# Altium PCB first-pcb-project.PcbDoc
Units mil, origin at the board's own origin, x right, y up, seen from the top; angles counter-clockwise.
Board outline 2321.98 x 2077.03 mil, 4 copper layers (Top Layer, GND Layer, 3.3V Layer, Bottom Layer), stack 23.756 mil thick; 88 components, 43 nets, 307 pads, 78 vias.
Unrouted connection lines stored in the file: 5.
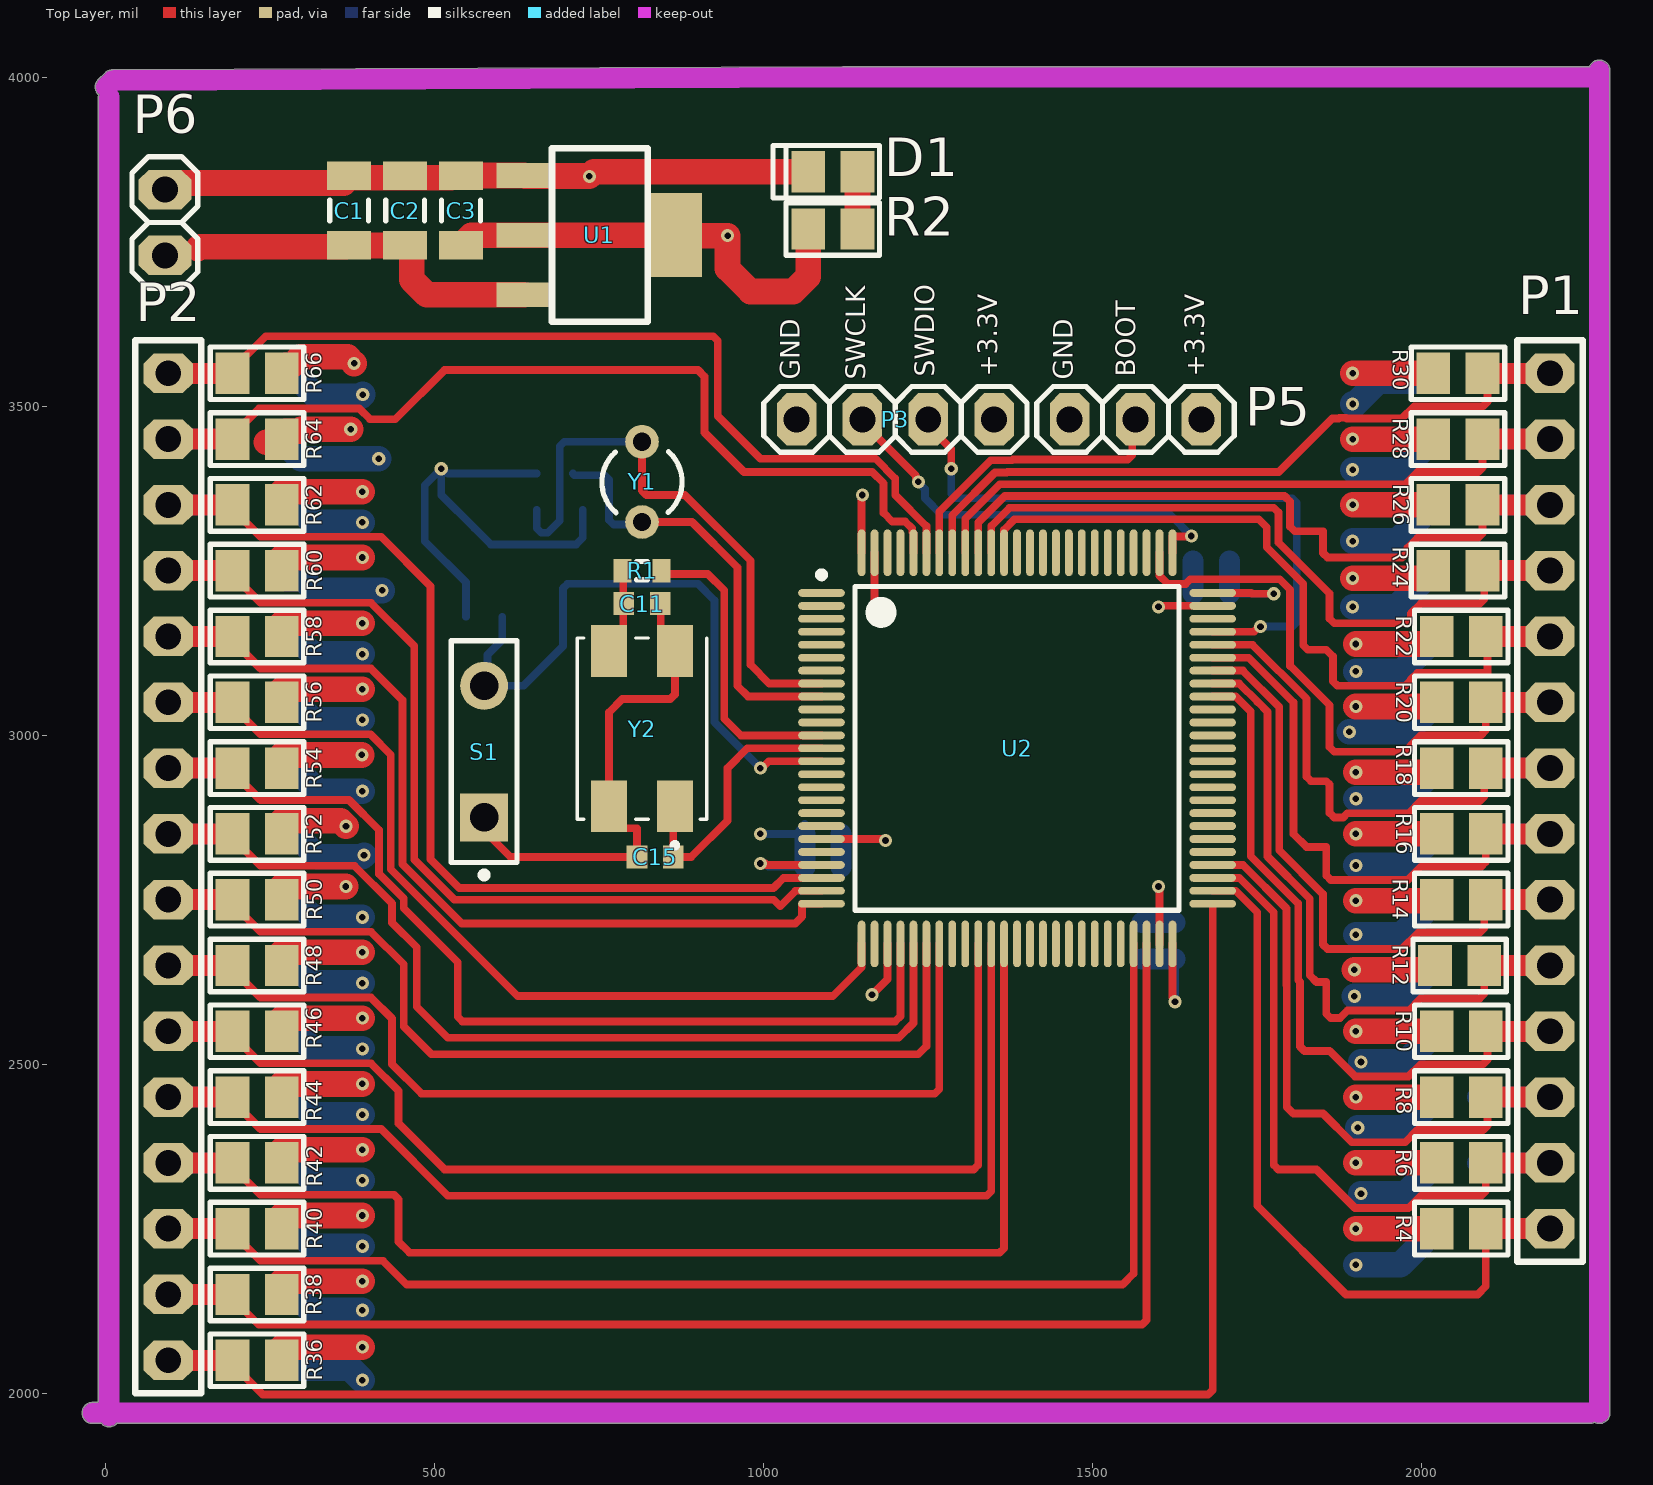
[diagram p0: Top Layer view]
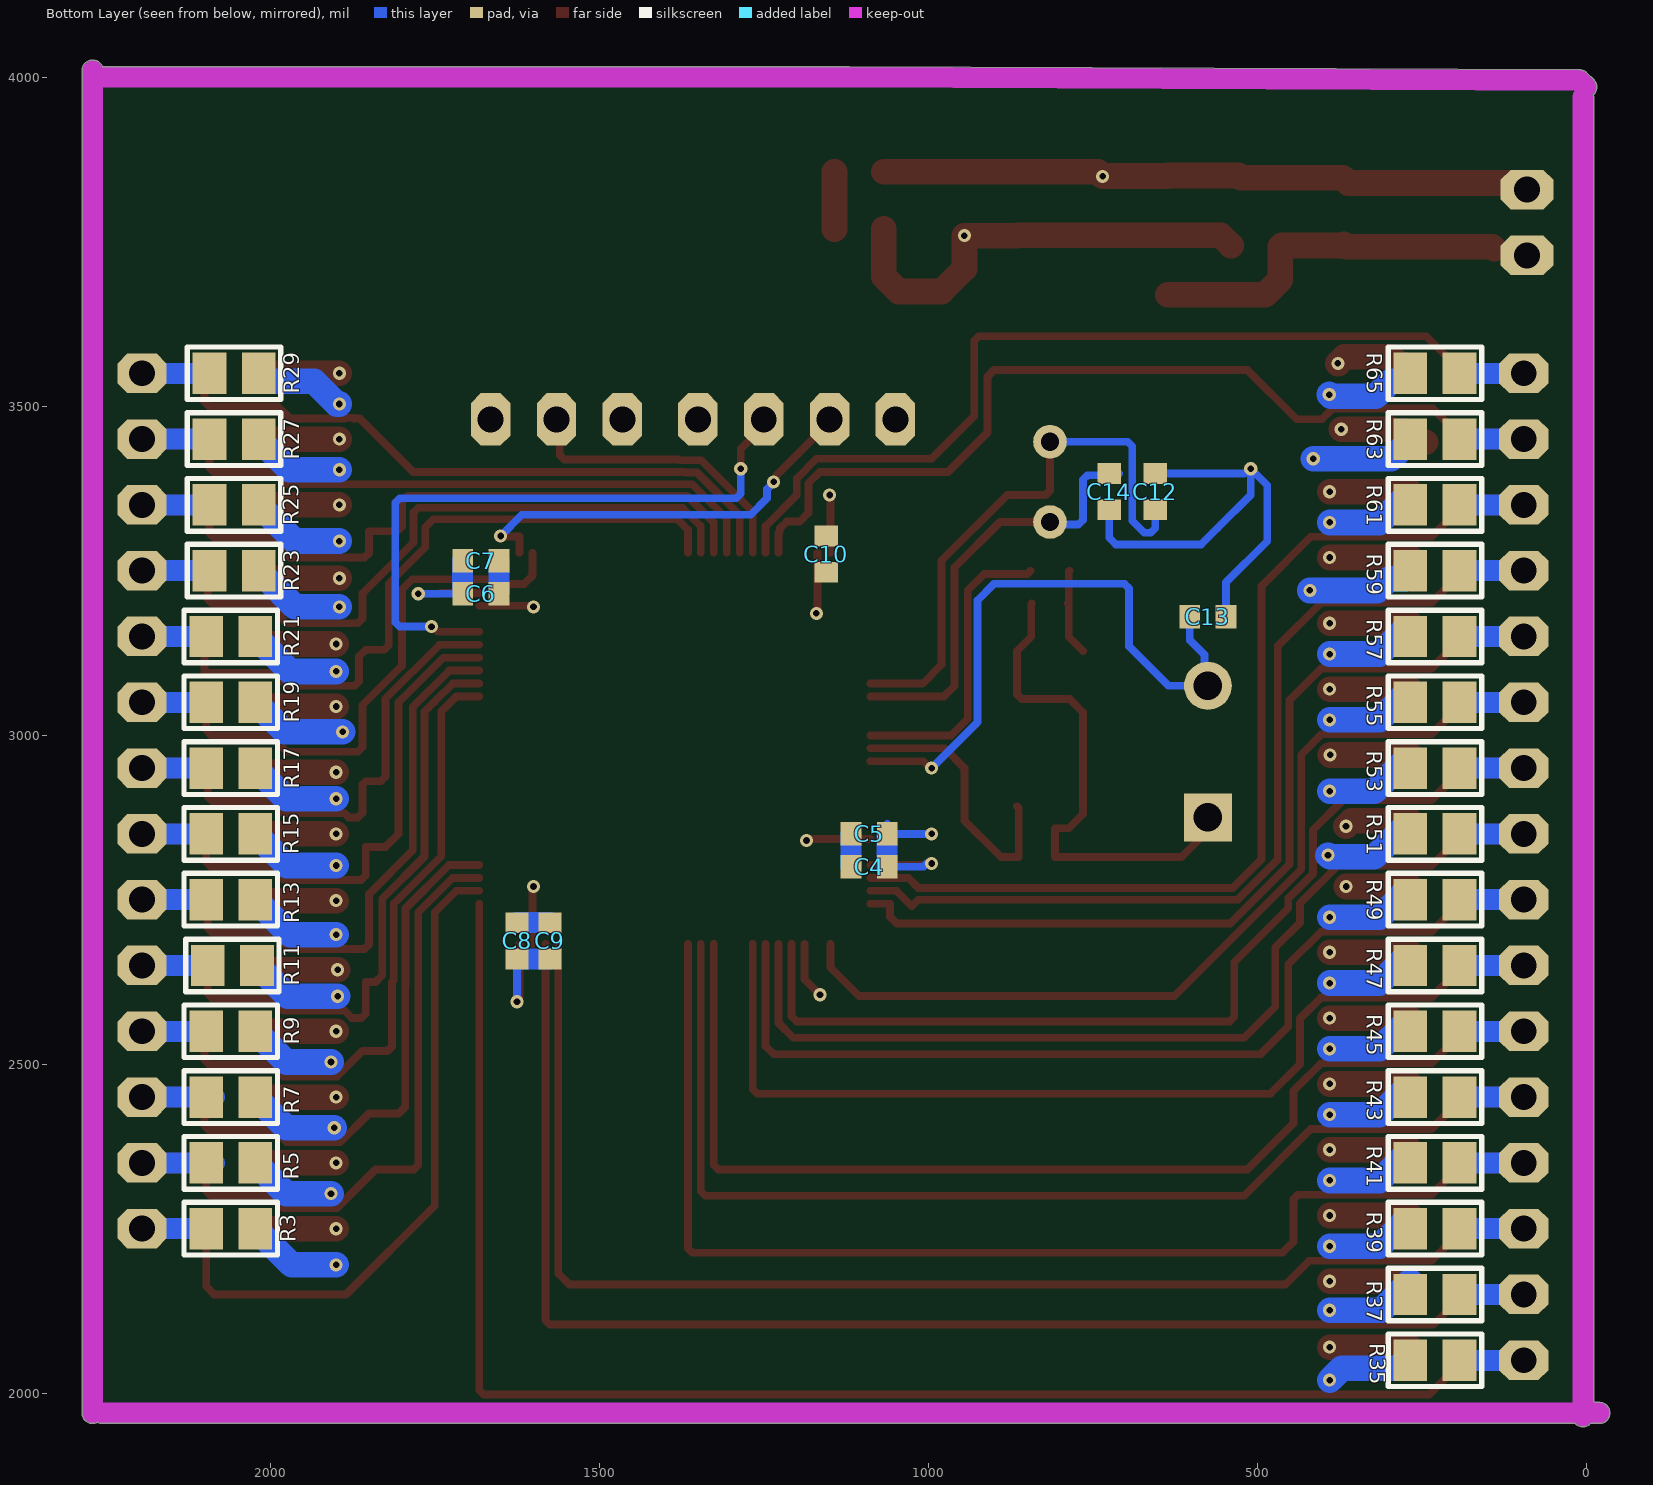
[diagram p1: Bottom Layer view, seen from below]
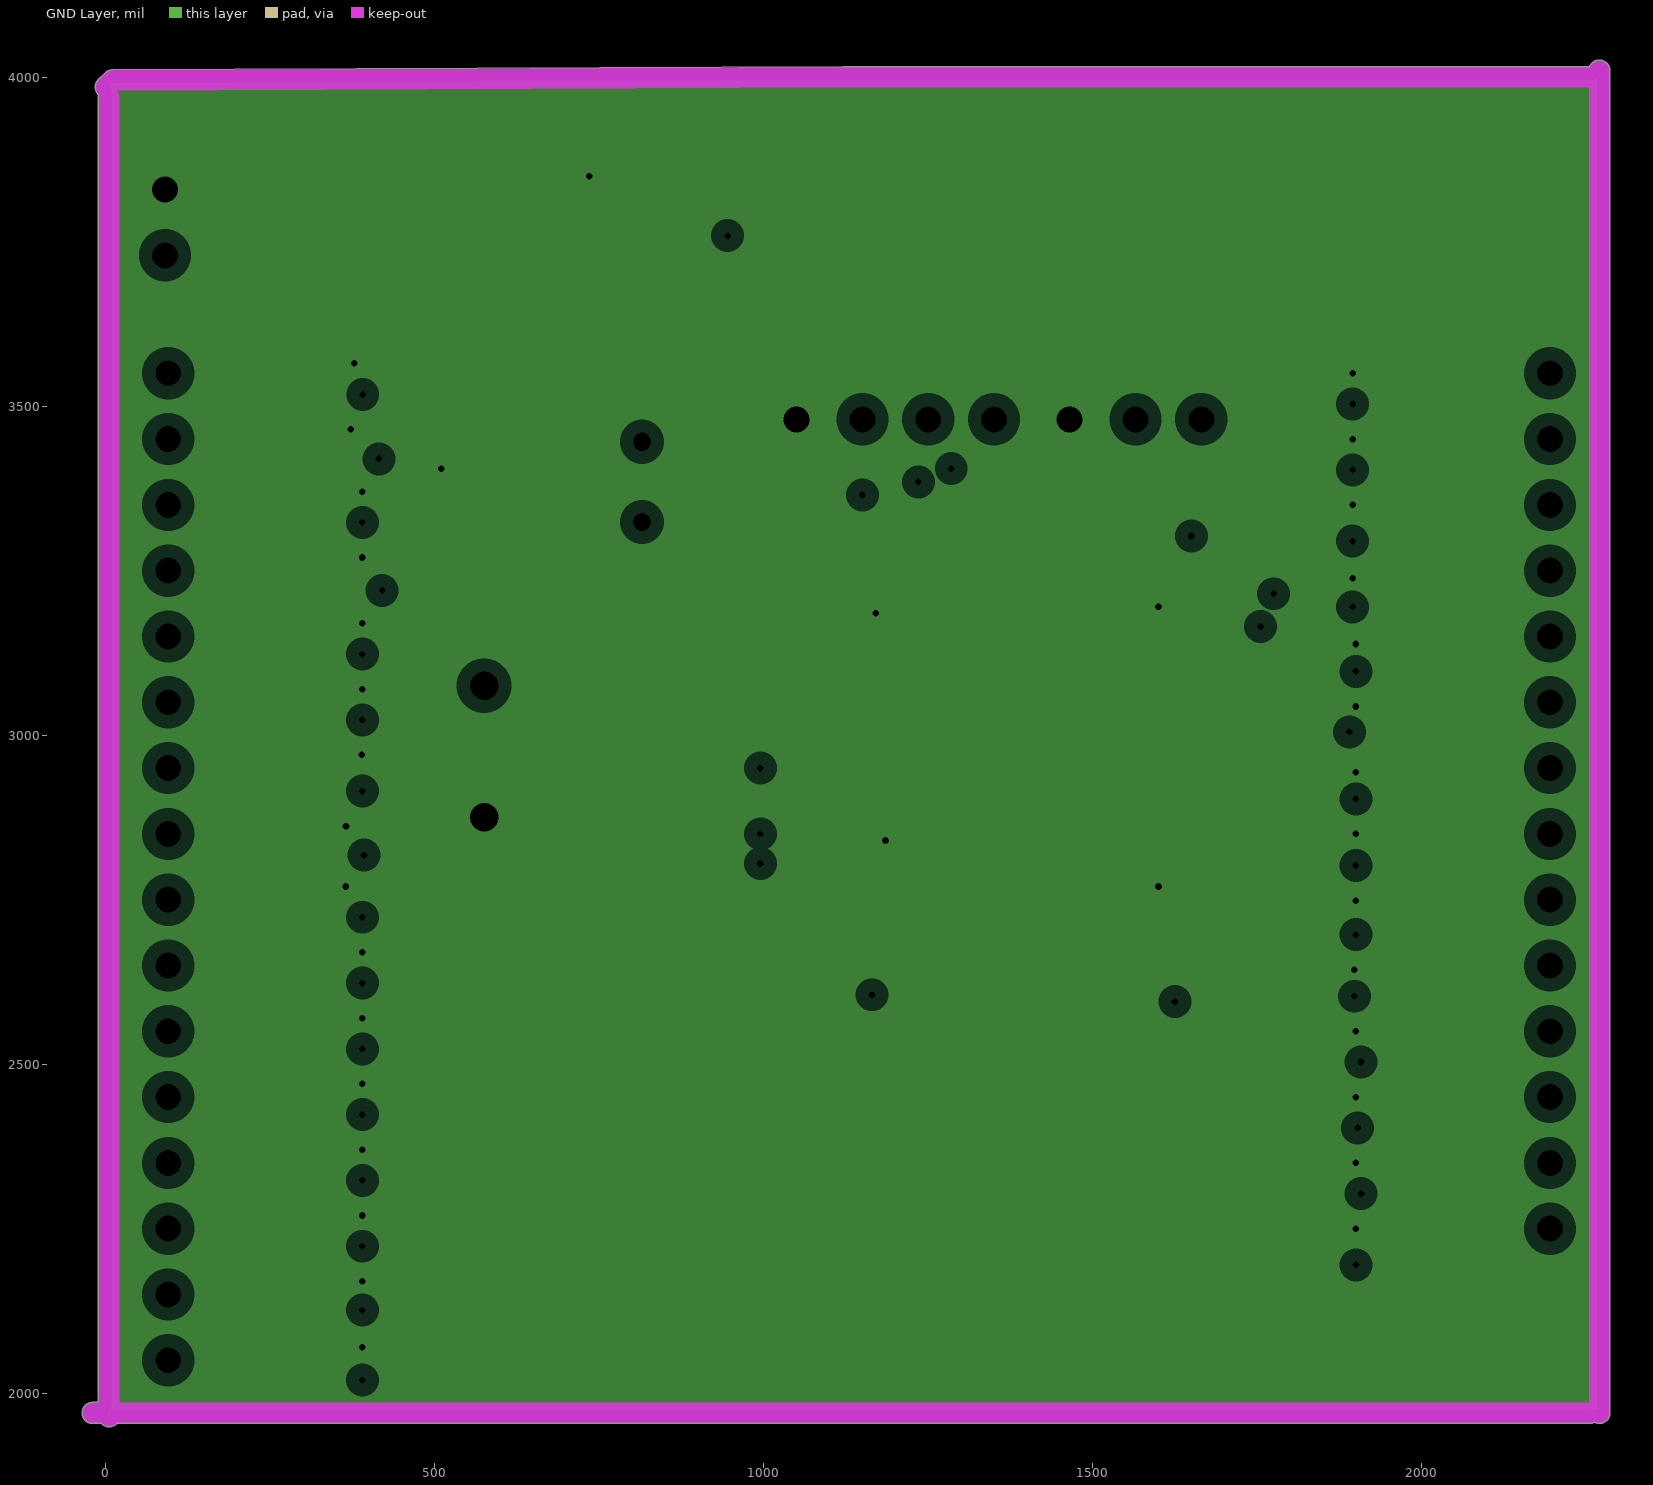
[diagram p2: GND Layer, clearances drawn from the general rule]
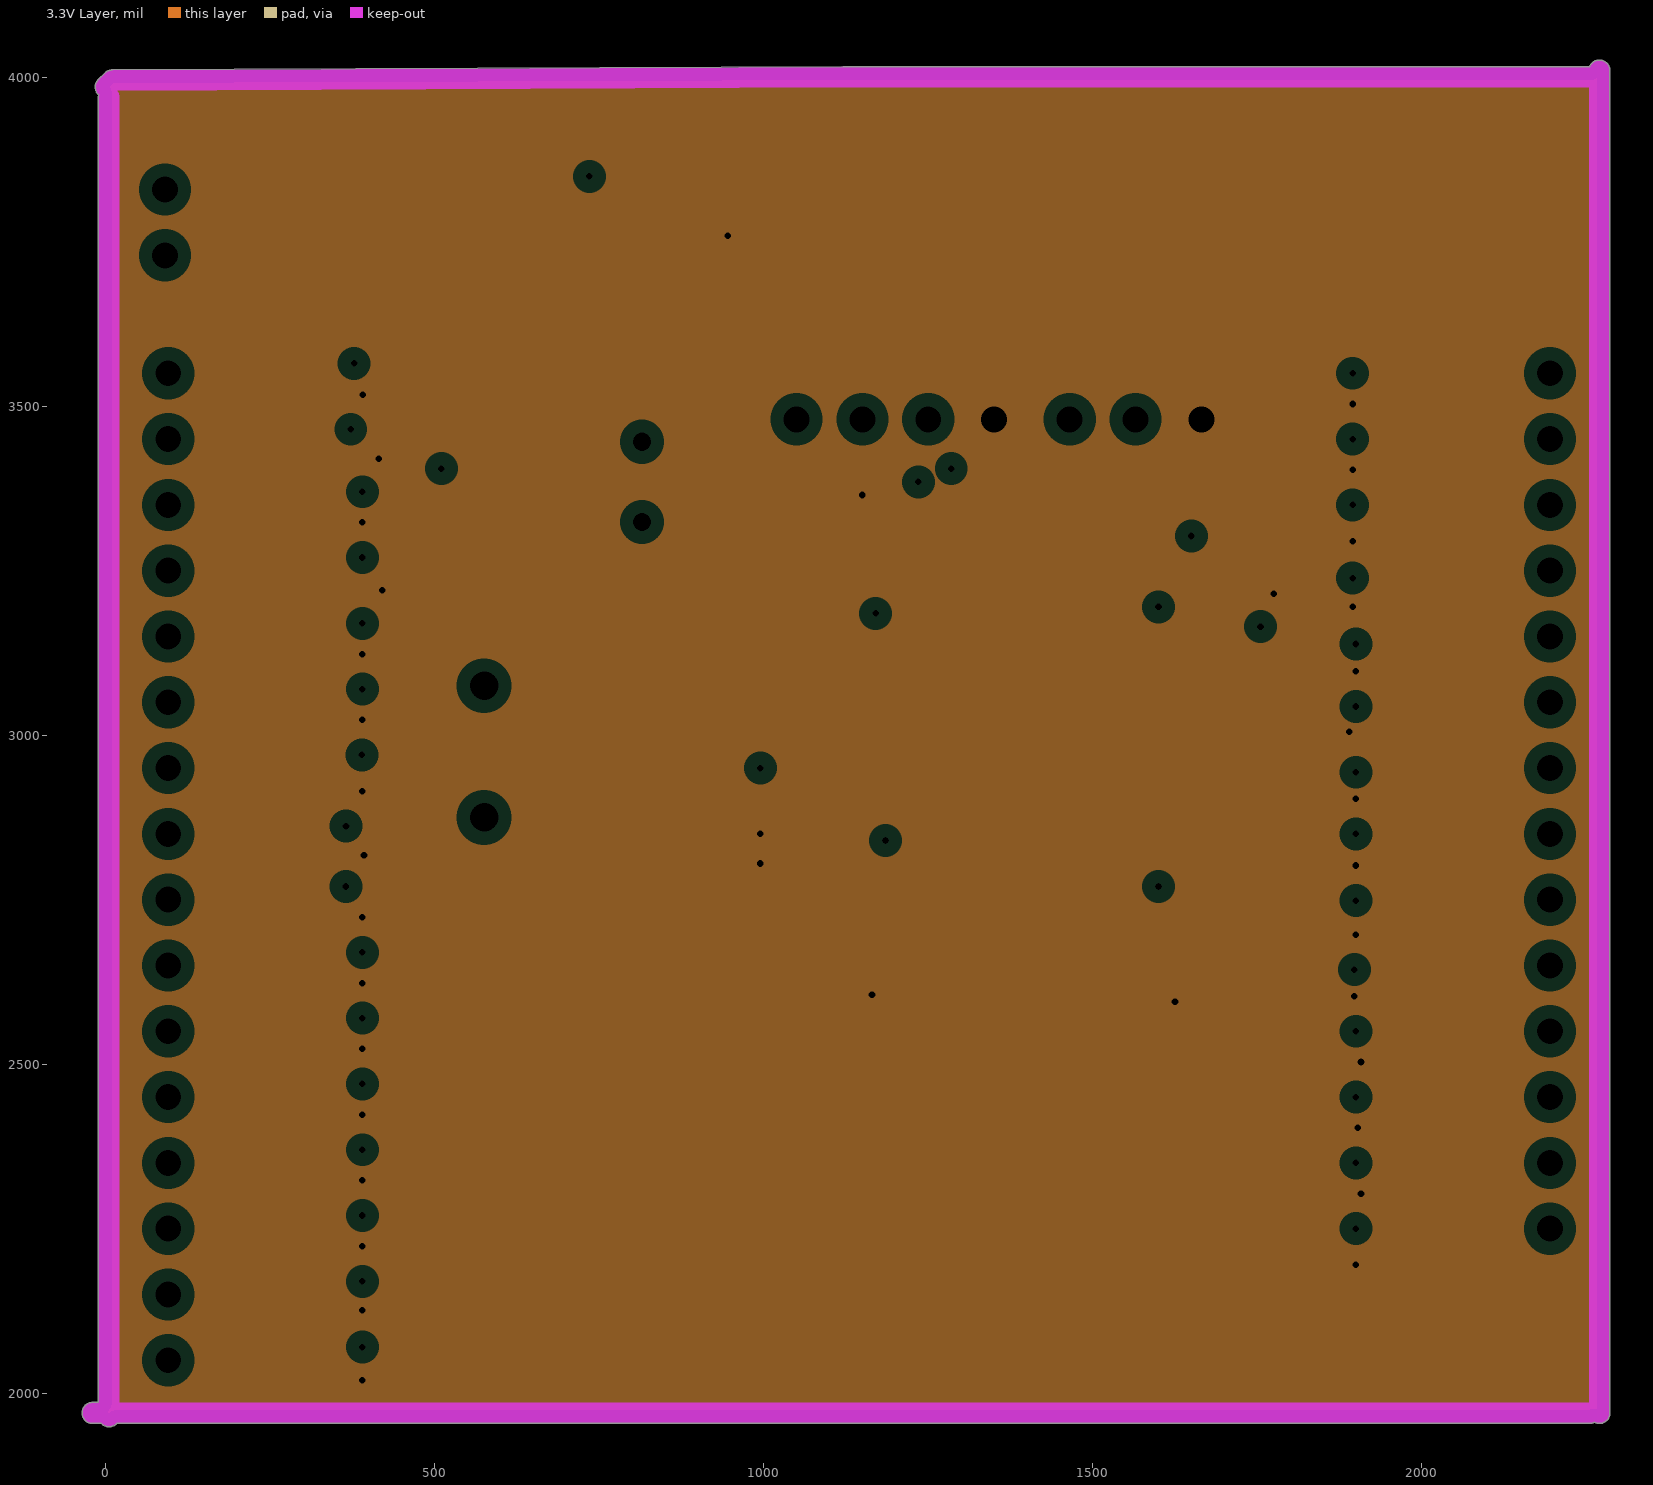
[diagram p3: 3.3V Layer, clearances drawn from the general rule]
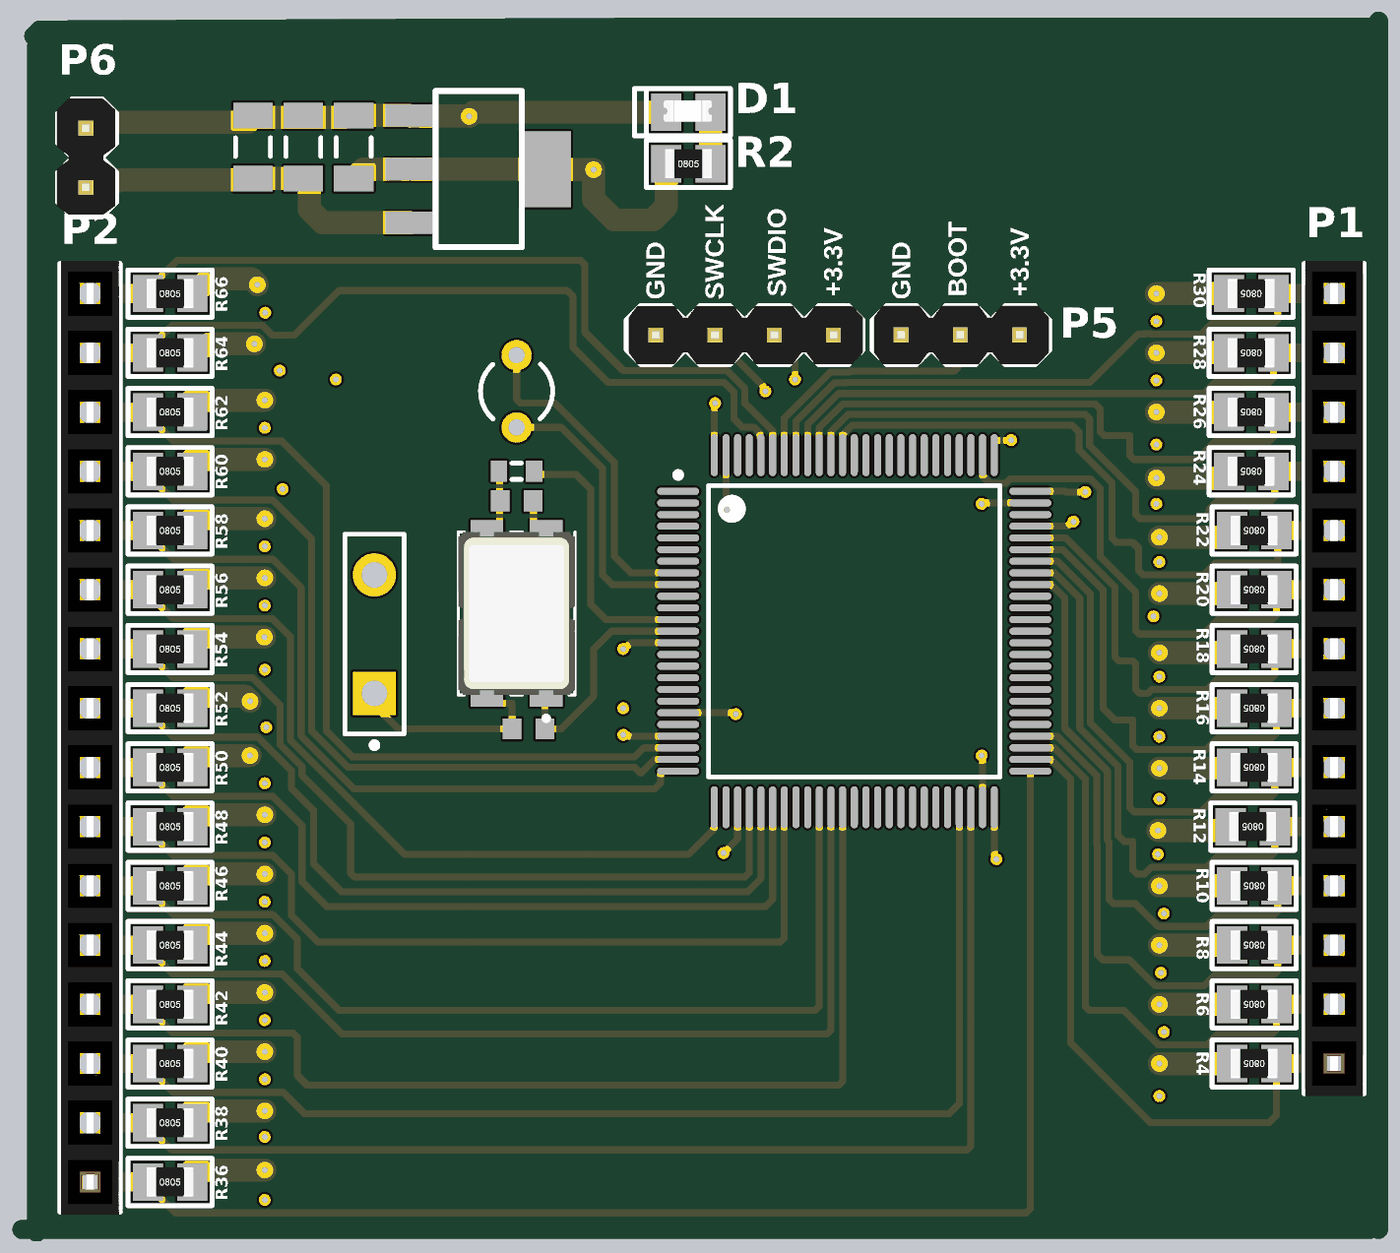
[diagram p4: 3D render of the assembled board from above, using the file's embedded part models]
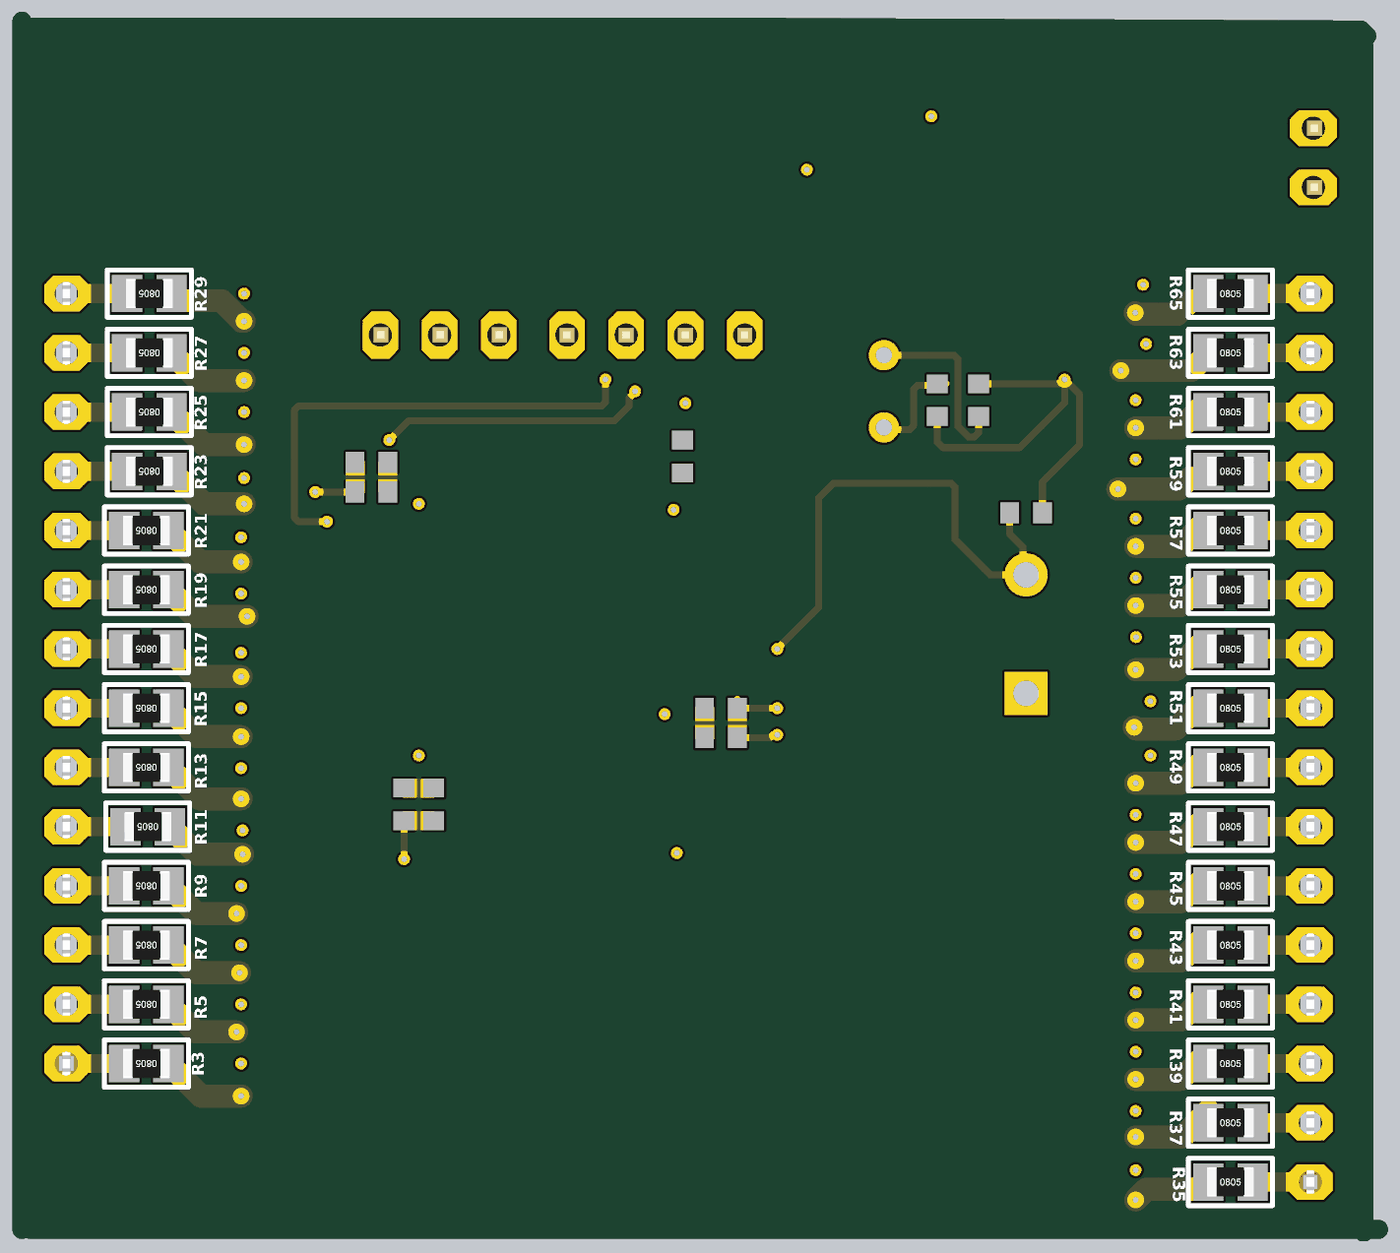
[diagram p5: 3D render of the assembled board from below, using the file's embedded part models]

## Layer stack, top to bottom
Top Solder: solder mask 0.4, Solder Resist, Dk 3.5
Top Layer: signal copper 1.4
Dielectric 2: prepreg 2.8, PP-006, Dk 4.1
GND Layer: plane copper 1.378, net GND
Dielectric 1: dielectric 12.6, FR-4, Dk 4.8
3.3V Layer: plane copper 1.378, net +3.3V
Dielectric 3: prepreg 2.8, PP-006, Dk 4.1
Bottom Layer: signal copper 1.4
Bottom Solder: solder mask 0.4, Solder Resist, Dk 3.5

## Board outline
-20,1986.01 -11.02,1986.01 -11.01,3970 -10.71,3973.1 cw(c0,3985) -11.32,3996.32 -1.32,4006.32 cw(c10,3995) 9.96,4011.02 1121.14,4016.01 1121.25,4016.02 2255,4016.02 2255.16,4016.01 cw(c2270,4010) 2286.01,4010 2286.01,3461.1 2286.01,1970 cw(c2270,1970) 2262.5,1955.85 cw(c2255,1970) 2255,1953.99 16.63,1953.99 cw(c5,1965) -6.63,1953.99 -20,1953.99 cw(c-20,1970)

## Design rules (kind name [scope] priority, off if disabled: settings)
Clearance [All] p1: gap=6 ignorepadtopadclearanceinfootprint=FALSE
PlaneClearance [All] p1: clearance=20
PlaneConnect [All] p1: planeconnectstyle=Direct reliefexpansion=20 reliefentries=4 reliefconductorwidth=10 reliefairgap=10
PolygonConnect [All] p1: connectstyle=Direct reliefconductorwidth=10 reliefentries=4 polygonreliefangle="90 Angle" airgapwidth=10
RoutingVias [All] p1: holewidth=10 width=20 viastyle="Through Hole" minholewidth=10 minwidth=20 maxholewidth=28 maxwidth=50
SilkToSilkClearance [All] p1: silktosilkclearance=4
SolderMaskExpansion [All] p1: expansion=4 istentingtop=FALSE
SupplyNets "Schematic Supply Nets_2" [InNet('GND')] p1: voltage=0.000
SupplyNets "Schematic Supply Nets_1" [InNet('+9V')] p2: voltage=0.000
SupplyNets "Schematic Supply Nets" [InNet('+3.3V')] p3: voltage=0.000
Width Width_1 [All] p1: maxlimit=40 minlimit=10 preferedwidth=10
27 further rules are at their usual default settings.

## Classes and differential pairs
component class MCU: C4 C5 C6 C7 C8 C9 C10 C11 C12 C13 C14 C15 P1 P2 P3 P5 R1 R3 R4 R5 R6 R7 R8 R9 R10 R11 R12 R13 R14 R15 R16 R17 R18 R19 R20 R21 R22 R23 R24 R25 R26 R27 R28 R29 R30 R35 R36 R37 R38 R39 R40 R41 R42 R43 R44 R45 R46 R47 R48 R49 R50 R51 R52 R53 R54 R55 R56 R57 R58 R59 R60 R61 R62 R63 R64 R65 R66 S1 U2 Y1 Y2
component class PowerSupply: C1 C2 C3 D1 P6 R2 U1

## Components (designator, comment, footprint, x,y, rotation, side; value= is the part's Value field where it differs from the comment)
C1 "Cap Semi" C1206 370,3797.4 r270 top value=100nF
C2 "Tantalum Capacitor" C1206 455,3797.4 r270 top value=10uF
C3 "Tantalum Capacitor" C1206 540,3797.4 r270 top value=10uF
C4 "Cap Semi" 1608[0603] 1090,2800 r180 bottom value=10nF
C5 "Cap Semi" 1608[0603] 1090,2850 r180 bottom value=1uF
C6 "Cap Semi" 1608[0603] 1680,3215 r0 bottom value=100nF
C7 "Cap Semi" 1608[0603] 1680,3265 r0 bottom value=100nF
C8 "Cap Semi" 1608[0603] 1625,2687.44 r270 bottom value=100nF
C9 "Cap Semi" 1608[0603] 1575,2687.56 r270 bottom value=100nF
C10 "Cap Semi" 1608[0603] 1155,3275 r90 bottom value=4.7uF
C11 "Cap Semi" 1608[0603] 815,3200 r0 top value=10pF
C12 "Cap Semi" 1608[0603] 655,3370 r90 bottom value=10pF
C13 "Cap Semi" 1608[0603] 575,3180 r180 bottom value=100nF
C14 "Cap Semi" 1608[0603] 725,3370 r270 bottom value=10pF
C15 "Cap Semi" 1608[0603] 835,2815 r180 top value=10pF
D1 "LED" MY_LED_0805 1105,3859.25 r0 top
P1 "Header 14" MY_FE14 2195,2900 r90 top
P2 "Header 16" MY_FE16 95,2800 r90 top
P3 "Header 4" My_1X04 1200,3480 r180 top
P5 "Header 3" My_1X03 1565,3480 r180 top
P6 "Header 2" My_1X02 90,3729.25 r270 top
R1 "Res3" J1-0603 815,3250 r180 top value=10R
R2 "220R" MY_0805 1105,3769.25 r0 top
R3 "1K" MY_0805 2060,2250 r0 bottom
R4 "1K" MY_0805 2060,2250 r180 top
R5 "1K" MY_0805 2060,2350 r0 bottom
R6 "1K" MY_0805 2060,2350 r180 top
R7 "1K" MY_0805 2060,2450 r0 bottom
R8 "1K" MY_0805 2060,2450 r180 top
R9 "1K" MY_0805 2060,2550 r0 bottom
R10 "1K" MY_0805 2060,2550 r180 top
R11 "1K" MY_0805 2057.6,2650 r0 bottom
R12 "1K" MY_0805 2057.6,2650 r180 top
R13 "1K" MY_0805 2060,2750 r0 bottom
R14 "1K" MY_0805 2060,2750 r180 top
R15 "1K" MY_0805 2060,2850 r0 bottom
R16 "1K" MY_0805 2060,2850 r180 top
R17 "1K" MY_0805 2060,2950 r0 bottom
R18 "1K" MY_0805 2060,2950 r180 top
R19 "1K" MY_0805 2060,3050 r0 bottom
R20 "1K" MY_0805 2060,3050 r180 top
R21 "1K" MY_0805 2060,3150 r0 bottom
R22 "1K" MY_0805 2060,3150 r180 top
R23 "1K" MY_0805 2055,3250 r0 bottom
R24 "1K" MY_0805 2055,3250 r180 top
R25 "1K" MY_0805 2055,3350 r0 bottom
R26 "1K" MY_0805 2055,3350 r180 top
R27 "1K" MY_0805 2055,3450 r0 bottom
R28 "1K" MY_0805 2055,3450 r180 top
R29 "1K" MY_0805 2055,3550 r0 bottom
R30 "1K" MY_0805 2055,3550 r180 top
R35 "1K" MY_0805 230,2050 r180 bottom
R36 "1K" MY_0805 230,2050 r0 top
R37 "1K" MY_0805 230,2150 r180 bottom
R38 "1K" MY_0805 230,2150 r0 top
R39 "1K" MY_0805 230,2250 r180 bottom
R40 "1K" MY_0805 230,2250 r0 top
R41 "1K" MY_0805 230,2350 r180 bottom
R42 "1K" MY_0805 230,2350 r0 top
R43 "1K" MY_0805 230,2450 r180 bottom
R44 "1K" MY_0805 230,2450 r0 top
R45 "1K" MY_0805 230,2550 r180 bottom
R46 "1K" MY_0805 230,2550 r0 top
R47 "1K" MY_0805 230,2650 r180 bottom
R48 "1K" MY_0805 230,2650 r0 top
R49 "1K" MY_0805 230,2750 r180 bottom
R50 "1K" MY_0805 230,2750 r0 top
R51 "1K" MY_0805 230,2850 r180 bottom
R52 "1K" MY_0805 230,2850 r0 top
R53 "1K" MY_0805 230,2950 r180 bottom
R54 "1K" MY_0805 230,2950 r0 top
R55 "1K" MY_0805 230,3050 r180 bottom
R56 "1K" MY_0805 230,3050 r0 top
R57 "1K" MY_0805 230,3150 r180 bottom
R58 "1K" MY_0805 230,3150 r0 top
R59 "1K" MY_0805 230,3250 r180 bottom
R60 "1K" MY_0805 230,3250 r0 top
R61 "1K" MY_0805 230,3350 r180 bottom
R62 "1K" MY_0805 230,3350 r0 top
R63 "1K" MY_0805 230,3450 r180 bottom
R64 "1K" MY_0805 230,3450 r0 top
R65 "1K" MY_0805 230,3550 r180 bottom
R66 "1K" MY_0805 230,3550 r0 top
S1 "SW-PB" SPST-2 575,2975 r90 top
U1 "LM1117 800-mA, Low-Dropout Linear Regulator" "4-pin SOT" 750,3760 r270 top
U2 "STM32F303VCT6" STM-LQFP100_N 1385,2980 r0 top
Y1 "XTAL" R38 815,3385 r0 top
Y2 "ECS-080-18-20BM-JEN-TR" ECS_ECS-060-18-20BM-JEN-TR 815,3010 r90 top

## Footprints (in the part's own frame and the unit in brackets; to place one, negate y for a bottom-side part, rotate by r counter-clockwise, add the part's x,y. Pads: shape width x height; smd on the part's side, far side on the other; paste and mask are expansions set on the pad)
"4-pin SOT" [mm]
  rect 0.95x2.15 smd: 0(2.3,-2.9) 1(-2.3,-2.9) 2(0,-2.9)
  rect 3.25x2.15 smd: 2(0,2.9)
  silkscreen extent -3.35,-1.82 3.35,1.88
1608[0603] [mm] "Chip Capacitor, Body 1.6x0.8mm, IPC High Density"
  rect 0.8x0.9 smd: 1(-0.7,0) 2(0.7,0)
  body extent -0.87,-0.48 0.87,0.48, height 1.3
C1206 [mm] "Chip Capacitor, Body 3.2x1.6mm, IPC High Density"
  rect 1.1x1.7 smd: 1(-1.35,0) 2(1.35,0)
  silkscreen extent -0.4,-0.75 0.4,0.75, body extent -1.7,-0.9 1.7,0.9, height 1.3
ECS_ECS-060-18-20BM-JEN-TR [mm]
  rect 2x1.4 smd: 1(-3,-1.27) 2(3,-1.27) 3(3,1.27) 4(-3,1.27)
  silkscreen extent -4.6,-2.5 3.5,2.5, body extent -3.5,-2.5 3.5,2.5, height 1.3
J1-0603 [mm] "Chip Resistor, Body 1.6x0.8mm, IPC High Density"
  rect 0.7x0.9 smd: 1(-0.75,0) 2(0.75,0)
  silkscreen extent -0.2,-0.35 0.2,0.35, body extent -0.85,-0.48 0.85,0.48, height 0.9
My_1X02 [mil]
  oct 60x80 hole 39.37: 1(-100,0) 2(0,0)
  silkscreen extent -150,-50 50,50, body extent -150,-51 46,47, height 323
My_1X03 [mil]
  oct 60x80 hole 39.37: 1(-100,0) 2(0,0) 3(100,0)
  silkscreen extent -150,-50 150,50, body extent -149,-49 147,49, height 323
My_1X04 [mil]
  oct 60x80 hole 39.37: 1(-150,0) 2(-50,0) 3(50,0) 4(150,0)
  silkscreen extent -200,-50 200,50, body extent -200,-49 196,49, height 323
MY_0805 [mm]
  rect 1.3x1.6 smd: 1(-0.95,0) 2(0.95,0)
  silkscreen extent -1.8,-1.02 1.8,1.02, body extent -1,-0.62 1,0.63, height 0.59
MY_FE14 [mil]
  oct 60x75 hole 39.37: 1(-650,0) 2(-550,0) 3(-450,0) 4(-350,0) 5(-250,0) 6(-150,0) 7(-50,0) 8(50,0) 9(150,0) 10(250,0) 11(350,0) 12(450,0) 13(550,0) 14(650,0)
  silkscreen extent -700,-50 700,50, body extent -705,-49 705,49, height 335
MY_FE16 [mil]
  oct 60x75 hole 39.37: 1(-750,0) 2(-650,0) 3(-550,0) 4(-450,0) 5(-350,0) 6(-250,0) 7(-150,0) 8(-50,0) 9(50,0) 10(150,0) 11(250,0) 12(350,0) 13(450,0) 14(550,0) 15(650,0) 16(750,0)
  silkscreen extent -800,-50 800,50, body extent -805,-49 805,49, height 335
MY_LED_0805 [mm]
  rect 1.3x1.6 smd: A(0.95,-0.076) K(-0.95,-0.076)
  silkscreen extent -2.31,-1.09 1.8,0.94, body extent -1.06,-0.48 1.01,0.42, height 0.86
R38 [mm] "Crystal, Thru-Hole; 2 Leads; Body 3.1 x 8.2 mm (Dia.xH)"
  round 1.3 hole 0.7: 1(0,1.55) 2(0,-1.55)
  silkscreen extent -1.55,-1.19 1.55,1.17
SPST-2 [mm] "Switch; 2 Leads"
  rect 1.85x1.85 hole 1.1: 1(-2.54,0)
  round 1.85 hole 1.1: 2(2.54,0)
  silkscreen extent -4.89,-1.27 4.28,1.27
STM-LQFP100_N [mm] "Thin QFP, 100-Leads, Body 14x14mm, Pitch 0.5mm, IPC Medium Density"
  oval 1.8x0.3 smd: 1(-7.55,6) 2(-7.55,5.5) 3(-7.55,5) 4(-7.55,4.5) 5(-7.55,4) 6(-7.55,3.5) 7(-7.55,3) 8(-7.55,2.5) 9(-7.55,2) 10(-7.55,1.5) 11(-7.55,1) 12(-7.55,0.5) 13(-7.55,0) 14(-7.55,-0.5) 15(-7.55,-1) 16(-7.55,-1.5) 17(-7.55,-2) 18(-7.55,-2.5) 19(-7.55,-3) 20(-7.55,-3.5) 21(-7.55,-4) 22(-7.55,-4.5) 23(-7.55,-5) 24(-7.55,-5.5) 25(-7.55,-6) 51(7.55,-6) 52(7.55,-5.5) 53(7.55,-5) 54(7.55,-4.5) 55(7.55,-4) 56(7.55,-3.5) 57(7.55,-3) 58(7.55,-2.5) 59(7.55,-2) 60(7.55,-1.5) 61(7.55,-1) 62(7.55,-0.5) 63(7.55,0) 64(7.55,0.5) 65(7.55,1) 66(7.55,1.5) 67(7.55,2) 68(7.55,2.5) 69(7.55,3) 70(7.55,3.5) 71(7.55,4) 72(7.55,4.5) 73(7.55,5) 74(7.55,5.5) 75(7.55,6)
  oval 0.3x1.8 smd: 26(-6,-7.55) 27(-5.5,-7.55) 28(-5,-7.55) 29(-4.5,-7.55) 30(-4,-7.55) 31(-3.5,-7.55) 32(-3,-7.55) 33(-2.5,-7.55) 34(-2,-7.55) 35(-1.5,-7.55) 36(-1,-7.55) 37(-0.5,-7.55) 38(0,-7.55) 39(0.5,-7.55) 40(1,-7.55) 41(1.5,-7.55) 42(2,-7.55) 43(2.5,-7.55) 44(3,-7.55) 45(3.5,-7.55) 46(4,-7.55) 47(4.5,-7.55) 48(5,-7.55) 49(5.5,-7.55) 50(6,-7.55) 76(6,7.55) 77(5.5,7.55) 78(5,7.55) 79(4.5,7.55) 80(4,7.55) 81(3.5,7.55) 82(3,7.55) 83(2.5,7.55) 84(2,7.55) 85(1.5,7.55) 86(1,7.55) 87(0.5,7.55) 88(0,7.55) 89(-0.5,7.55) 90(-1,7.55) 91(-1.5,7.55) 92(-2,7.55) 93(-2.5,7.55) 94(-3,7.55) 95(-3.5,7.55) 96(-4,7.55) 97(-4.5,7.55) 98(-5,7.55) 99(-5.5,7.55) 100(-6,7.55)
  silkscreen extent -7.67,-6.25 6.25,6.82

## Part data
C1 C4 C5 C6 C7 C8 C9 C10 C11 C12 C13 C14 C15: "Capacitor (Semiconductor SIM Model)", LatestRevisionDate=29-May-2009, LatestRevisionNote="IPC-7351 Footprint Added.", PackageDescription="Chip Capacitor", PackageReference=C1206, Published=8-Jun-2000, Publisher="Altium Limited"
C2 C3: library part "Cap Semi", "Capacitor (Semiconductor SIM Model)", LatestRevisionDate=29-May-2009, LatestRevisionNote="IPC-7351 Footprint Added.", PackageDescription="Chip Capacitor", PackageReference=C1206, Published=8-Jun-2000, Publisher="Altium Limited"
D1: "Typical INFRARED GaAs LED", ASiD Part Number=LED-AS
P1: "Header, 14-Pin", ASiD Part Number="Header 14-AS"
P2: "Header, 16-Pin", ASiD Part Number="Header 16-AS"
P3: "Header, 4-Pin", ASiD Part Number="Header 4-AS"
P5: "Header, 3-Pin", ASiD Part Number="Header 3-AS"
P6: "Header, 2-Pin", ASiD Part Number="Header 2-AS"
R1: "Resistor", LatestRevisionDate=29-May-2009, LatestRevisionNote="IPC-7351 Footprint Added.", PackageDescription="Chip Resistor", PackageReference=J1-0603, Published=8-Jun-2000, Publisher="Altium Limited"
R2 R3 R4 R5 R6 R7 R8 R9 R10 R11 R12 R13 R14 R15 R16 R17 R18 R19 R20 R21 R22 R23 R24 R25 R26 R27 R28 R29 R30 R35 R36 R37 R38 R39 R40 R41 R42 R43 R44 R45 R46 R47 R48 R49 R50 R51 R52 R53 R54 R55 R56 R57 R58 R59 R60 R61 R62 R63 R64 R65 R66: library part Res, "Standard resistor", ASiD Part Number=Res-AS
S1: "Switch", LatestRevisionDate=17-Jul-2002, LatestRevisionNote="Re-released for DXP Platform.", PackageDescription="Switch; 2 Leads", PackageReference=SPST-2, Published=24-Mar-1999, Publisher="Altium Limited"
U1: library part lm1117, "The LM1117 is a low dropout voltage regulator with a / dropout of 1.2 V at 800 mA of load current. / The LM1117 is available in an adjustable version, / which can set the output voltage from 1.25 V to 13.8 V / with only two external resistors. In addition, the device / is available in five fixed voltages, 1.8 V, 2.5 V, 3.3 V, / and 5 V. / The LM1117 offers current limiting and thermal / shutdown. The circuit includes a Zener trimmed bandgap reference to assure output voltage accuracy to / within ±1%. / A minimum of 10-µF tantalum capacitor is required / at the output to improve the transient response and / stability.", Manufacturer="Texas Instruments (TI)", Voltage=3.3V, Component Name=lm1117, Datasheet=https://www.ti.com/lit/ds/symlink/lm1117.pdf
U2: "ARM Cortex-M4 32-bit MCU, 256 KB Flash, 40 KB Internal RAM, 87 I/Os, 100-pin LQFP, -40 to 85 degC, Tray", I/Os (High Current)=87, Operating Frequency(F) (Processor speed) (MHz)=72, Supplier Part Number 1=497-13233-ND, Supply Voltage(Vcc) min (V)=2, ComponentLink1Description="Manufacturer URL", ComponentLink1URL=http://www.st.com/web/en/home.html, ComponentLink2Description=Datasheet, ComponentLink2URL=http://www.st.com/st-web-ui/static/active/en/resource/technical/document/datasheet/DM00058181.pdf, ComponentLink3Description="Package Specification", ComponentLink3URL=http://www.st.com/st-web-ui/static/active/en/resource/technical/document/data_brief/DM00071938.pdf, Core="ARM Cortex-M4", D/A Converter="2x12-bit (2 Channel)", DatasheetVersion="Rev. 6", FLASH Size (Prog) (kB)=256, Internal RAM Size (kB)=40, Mounting Technology="Surface Mount", PackageDescription="100-Pin Low Profile Quad Flat Package, 14 x 14 mm Body, 0.5 mm Pitch", PackageReference=LQFP100, PackageVersion="Rev. 1, 06/2013", Packing=Tray, PartNumber=STM32F303VCT6, Supplier 1=Digi-Key, Supplier 2=Farnell, Supplier 3=Newark, Supplier 4=Newark, Supplier 5=Mouser, Supplier Part Number 2=2215110, Supplier Part Number 3=43W6527, Supplier Part Number 4=46W2194, Supplier Part Number 5=511-STM32F303VCT6
Y1: "Crystal Oscillator", LatestRevisionDate=17-Jul-2002, LatestRevisionNote="Re-released for DXP Platform.", PackageDescription="Crystal, Thru-Hole; 2 Leads; Body 3.1 x 8.2 mm (Dia.xH)", PackageReference=R38, Published=8-Jun-2000, Publisher="Altium Limited"
Y2: "8 MHz Â±20ppm Crystal 18pF 60 Ohms 4-SMD, No Lead", Package="CSM-8M-20BM-4 ECS", Check_prices=https://www.snapeda.com/parts/ECS-080-18-20BM-JEN-TR/ECS/view-part/?ref=eda, MF="ECS Inc.", MP=ECS-080-18-20BM-JEN-TR, SnapEDA_Link=https://www.snapeda.com/parts/ECS-080-18-20BM-JEN-TR/ECS/view-part/?ref=snap

## Via types
v1: diameter 20, hole 10, Top Layer to Bottom Layer, 78 vias

## Nets (pads, with @x,y where several pads share a name; then routed paths per layer and width w, separated by ;. In a path a pad name is that pad's centre, name@x,y a point inside that pad or via, vN(x,y) a via of type N, cw(c..) or ccw(c..) an arc to the next point about the centre after c; other vN are vias at no path point)
8MHz_IN: C11.1 R1.2 Y2.3 | length 130.9
  Top Layer w11.8: Y2.3 786.66,3149.77 C11.1@786.66,3199.22 ; R1.2 786.46,3249.02 786.46,3200.98 C11.1
8MHz_OUT: C15.1 U2.13 Y2.1 | length 418.3
  Top Layer w11.8: Y2.1 862.56,2889.45 C15.1 890,2815 945,2870 945,2950 975,2980 U2.13
32KHz_IN: C12.1 U2.8 Y1.1 | length 875.1
  Top Layer w11.8: Y1.1 815,3371.91 821.91,3365 880,3365 980,3265 980,3106.91 1008.49,3078.43 U2.8
  Bottom Layer w11.8: C12.1 655,3314.71 661.91,3307.8 671.69,3307.8 690,3326.11 690,3439.11 696.91,3446.02 Y1.1
32KHz_OUT: C14.1 U2.9 Y1.2 | length 662.7
  Top Layer w11.8: Y1.2 891.02,3323.98 960,3255 960,3075 976.26,3058.74 U2.9
  Bottom Layer w11.8: C14.1@710,3397.56 712.56,3395 758.09,3395 765,3388.09 765,3326.91 771.91,3320 811.02,3320 Y1.2
+3.3V: C3.2 C4.2 C5.2 C6.2 C7.2 C8.2 C9.2 C10.2 P3.1 P5.1 R2.1 R3.1 R5.1 R7.1 R9.1 R11.1 R13.1 R15.1 R17.1 R19.1 R21.1 R23.1 R25.1 R27.1 R29.1 R35.1 R37.1 R39.1 R41.1 R43.1 R45.1 R47.1 R49.1 R51.1 R53.1 R55.1 R57.1 R59.1 R61.1 R63.1 R65.1 U1.2 U2.22 U2.28 U2.50 U2.75 U2.100 | length 5465.2
  Top Layer w11.8: v1@1000,2805 1002.22,2805 1004.38,2802.83 U2.22 ; U2.100 1148.78,3363.78 v1(1150,3365) ; v1(1164.51,2605.49) 1188.15,2629.12 U2.28 ; U2.50 1621.22,2601 1625,2597.22 v1(1625,2595) ; U2.75 1740.88,3216.22 1742.1,3215 v1(1775,3215)
  Top Layer w39: C3.2 555.75,3760 635.83,3760 864.17,3760 864.92,3759.25 v1(945,3759.25) 945,3709.25 980,3674.25 1044.75,3674.25 1067.6,3697.1 R2.1
  Bottom Layer w11.8: v1(995,2850) C5.2 ; v1@1000,2805 1002.22,2805 1007.22,2800 C4.2 ; v1(1625,2595) C8.2 ; C6.2 v1(1775,3215)
  Bottom Layer w32: C4.2 C5.2 ; C9.2 1575.06,2659.94 1624.94,2659.94 C8.2 ; C6.2 C7.2
  Bottom Layer w39: R63.1@261.8,3449.7 273.49,3438 278.33,3438 296.34,3420 v1(415,3420) ; R65.1@266.8,3544.7 273.49,3538 297,3538 320,3515 388,3515 v1(390.66,3517.66) ; R37.1@267.4,2170 311.28,2126.12 v1(390,2126.12) ; R35.1@273.49,2058 273.49,2038 371.8,2038 v1(390,2019.8) ; R59.1@273.49,3258 273.49,3238 299.4,3238 317.4,3220 v1(420,3220) ; R39.1@279.4,2258 314.1,2223.3 v1(390,2223.3) ; R41.1@279.4,2358 314.1,2323.3 v1(390,2323.3) ; R43.1@279.4,2458 314.1,2423.3 v1(390,2423.3) ; R45.1@279.4,2558 314.1,2523.3 v1(390,2523.3) ; R47.1@279.4,2658 314.1,2623.3 v1(390,2623.3) ; R49.1@279.4,2758 314.1,2723.3 v1(390,2723.3) ; R51.1@279.4,2858 322.4,2815 389.68,2815 v1(392.47,2817.79) ; R53.1@279.4,2958 322.4,2915 v1(390,2915) ; R55.1@279.4,3058 314.1,3023.3 v1(390,3023.3) ; R57.1@279.4,3158 314.1,3123.3 v1(390,3123.3) ; R61.1@279.4,3358 314.1,3323.3 v1(390,3323.3) ; v1(1890,3005) 1977.6,3005 2010.6,3038 R19.1@2016.51,3038 ; v1(1895,3195) 1962.6,3195 R23.1@2005.6,3238 ; v1(1895,3295) 1962.6,3295 R25.1@2005.6,3338 ; v1(1895,3403.3) 1970.9,3403.3 R27.1@2005.6,3438 ; v1(1895,3503.3) 1898.8,3503.3 1933.51,3538 2013,3538 R29.1@2017.6,3542.6 ; v1(1897.6,2603.3) 1973.5,2603.3 R11.1@2008.2,2638 ; v1(1900,2195) 1967.6,2195 R3.1@2010.6,2238 ; v1(1900,2696.9) 1969.5,2696.9 R13.1@2010.6,2738 ; v1(1900,2801.9) 1974.5,2801.9 R15.1@2010.6,2838 ; v1(1900,2903.3) 1975.9,2903.3 R17.1@2010.6,2938 ; v1(1900,3096.9) 1969.5,3096.9 R21.1@2010.6,3138 ; v1(1902.67,2403.3) 1975.9,2403.3 R7.1@2010.6,2438 ; v1(1907.67,2303.3) 1975.9,2303.3 R5.1@2010.6,2338 ; v1(1907.67,2503.3) 1975.9,2503.3 R9.1@2010.6,2538
  other v1: 995,2805
+9V: C1.2 C2.2 P6.2 U1.0 | length 557.1
  Top Layer w39: 140,3739.25 142.85,3742.1 364.7,3742.1 C1.2@368.43,3745.83 ; C1.2 C2.2 462.85,3744.25 465,3742.1 465,3692.29 487.85,3669.45 U1.0
BOOT: P5.2 U2.94 | length 447.5
  Top Layer w11.8: U2.94 1266.89,3339.71 1344.98,3417.8 1377.8,3417.8 1378.91,3418.91 1553.09,3418.91 1560,3425.82 1560,3475 P5.2
GND: C1.1 C2.1 C3.1 C4.1 C5.1 C6.1 C7.1 C8.1 C9.1 C10.1 C11.2 C12.2 C13.2 C14.2 C15.2 D1.K P3.4 P5.3 P6.1 R4.2 R6.2 R8.2 R10.2 R12.2 R14.2 R16.2 R18.2 R20.2 R22.2 R24.2 R26.2 R28.2 R30.2 R36.2 R38.2 R40.2 R42.2 R44.2 R46.2 R48.2 R50.2 R52.2 R54.2 R56.2 R58.2 R60.2 R62.2 R64.2 R66.2 S1.1 U1.1 U2.20 U2.49 U2.74 U2.99 Y2.2 Y2.4 | length 6666.2
  Top Layer w11.8: S1.1@580,2850 615,2815 C15.2 807.44,2858.09 807.11,2858.42 786.66,2858.42 765,2880.08 Y2.4 765,3035 785,3055 858.09,3055 865,3061.91 Y2.2 843.34,3149.77 843.34,3199.22 C11.2 ; U2.20 1182.8,2842.2 v1(1185,2840) ; U2.99 1168.46,3186.54 v1(1170,3185) ; v1(1600,2770) 1601.54,2768.46 U2.49 ; v1(1600,3195) 1601.54,3196.54 U2.74
  Top Layer w39: P6.1@90,3839.25 361.85,3839.25 370,3847.4 525.04,3847.4 528.19,3850.55 C3.1 U1.1 636.63,3849.75 734.5,3849.75 v1(735,3849.25) 742,3856.25 D1.K ; R64.2@243.69,3445 R64.2@267.4,3445 ; R36.2@267.4,2070 v1(390,2070) ; R38.2@267.4,2170 v1(390,2170) ; R40.2@267.4,2270 v1(390,2270) ; R42.2@267.4,2370 v1(390,2370) ; R44.2@267.4,2470 v1(390,2470) ; R46.2@267.4,2570 v1(390,2570) ; R48.2@267.4,2670 v1(390,2670) ; R50.2@267.4,2770 v1(364.94,2770) ; R52.2@267.4,2870 356.79,2870 v1(365.09,2861.7) ; R54.2@267.4,2970 v1(389.32,2970) ; R56.2@267.4,3070 v1(390,3070) ; R58.2@267.4,3170 v1(390,3170) ; R60.2@267.4,3270 v1(390,3270) ; R62.2@267.4,3370 v1(390,3370) ; R64.2 267.4,3455.91 273.49,3462 293.33,3462 296.34,3465 v1(372.4,3465) ; R66.2 267.4,3555.91 273.49,3562 283.33,3562 296.34,3575 367.4,3575 v1(377.4,3565) ; v1(1895,3238.6) 2011.51,3238.6 2017.6,3244.69 R24.2 ; v1(1895,3350) R26.2 ; v1(1895,3450) R28.2 ; v1(1895,3550) R30.2 ; v1(1897.6,2643.6) 2014.11,2643.6 2020.2,2649.69 R12.2 ; v1(1900,2250) R4.2 ; v1(1900,2350) R6.2 ; v1(1900,2450) R8.2 ; v1(1900,2550) R10.2 ; v1(1900,2748.6) 2021.2,2748.6 R14.2 ; v1(1900,2850) R16.2 ; v1(1900,2943.6) 2016.51,2943.6 2022.6,2949.69 R18.2 ; v1(1900,3043.6) 2016.51,3043.6 2022.6,3049.69 R20.2 ; v1(1900,3138.6) 2016.51,3138.6 2022.6,3144.69 R22.2
  Bottom Layer w11.8: C13.2 547.44,3232.56 485,3295 485,3380 v1(510,3405) ; C12.2 519.66,3397.56 512.22,3405 v1(510,3405) ; C14.2 725,3300 715,3290 585,3290 560,3315 510,3365 v1(510,3405)
  Bottom Layer w32: C4.1 C5.1 ; C9.1 1575.06,2715.06 1624.94,2715.06 C8.1 ; C6.1 C7.1
NetD1_A: D1.A R2.2 | length 87
  Top Layer w39: R2.2 D1.A
NetR1_1: R1.1 U2.12 | length 461.1
  Top Layer w11.8: R1.1 849.53,3245 915,3245 940,3220 940,3025 965.32,2999.68 U2.12
NRST: C13.1 S1.2 U2.14 | length 978.6
  Top Layer w11.8: v1(995,2950) 997.22,2950 1007.53,2960.32 U2.14
  Bottom Layer w11.8: S1.2@570,3075 635,3075 695,3135 695,3223.09 701.91,3230 900,3230 925,3205 925,3020 v1(995,2950) ; S1.2 580.18,3080.18 580.18,3122.2 602.56,3144.58 C13.1
PA0: P2.14 R61.2 R62.1 U2.23 | length 1578.4
  Top Layer w11.8: R62.1@192.6,3344.09 235.29,3301.4 418.6,3301.4 493.65,3226.35 493.65,2811.55 537.41,2767.8 1014.85,2767.8 1030.2,2783.15 U2.23
  Top Layer w32: P2.14 R62.1
  Bottom Layer w32: P2.14 R61.2
PA1: P2.13 R59.2 R60.1 U2.24 | length 1498.9
  Top Layer w11.8: R60.1@192.6,3244.09 235.29,3201.4 403.01,3201.4 468.88,3135.52 468.88,2909.75 468.88,2811.15 530.03,2750 1015,2750 1025,2740 1048.46,2763.46 U2.24
  Top Layer w32: P2.13 R60.1
  Bottom Layer w32: P2.13 R59.2
PA2: P2.12 R57.2 R58.1 U2.25 | length 1438.6
  Top Layer w11.8: R58.1@192.6,3144.09 235.29,3101.4 403.01,3101.4 451.08,3053.32 451.08,2803.78 541.08,2713.78 1047.76,2713.78 1058.23,2724.25 U2.25@1058.23,2743.77 ; U2.25@1058.23,2743.78 U2.25
  Top Layer w32: P2.12 R58.1
  Bottom Layer w32: P2.12 R57.2
PA3: P2.11 R55.2 R56.1 U2.26 | length 1489.5
  Top Layer w11.8: R56.1@192.6,3044.09 235.29,3001.4 402.32,3001.4 433.28,2970.44 433.28,2796.41 626.2,2603.48 1105,2603.48 1148.78,2647.26 U2.26
  Top Layer w32: P2.11 R56.1
  Bottom Layer w32: P2.11 R55.2
PA4: P2.10 R53.2 R54.1 U2.29 | length 1576.9
  Top Layer w11.8: R54.1@192.6,2944.09 235.29,2901.4 369.8,2901.4 415.48,2855.72 415.48,2789.03 452.8,2751.72 452.8,2736.85 535,2654.65 535,2571.91 541.91,2565 1200,2565 1207.83,2572.83 U2.29
  Top Layer w32: P2.10 R54.1
  Bottom Layer w32: P2.10 R53.2
PA5: P2.9 R51.2 R52.1 U2.30 | length 1555.6
  Top Layer w11.8: R52.1@192.6,2844.09 235.29,2801.4 377.94,2801.4 435,2744.34 435,2715 472.5,2677.5 472.5,2587.5 520,2540 1205,2540 1227.52,2562.52 U2.30
  Top Layer w32: P2.9 R52.1
  Bottom Layer w32: P2.9 R51.2
PA6: P2.8 R49.2 R50.1 U2.31 | length 1560.6
  Top Layer w11.8: R50.1@192.6,2744.09 235.29,2701.4 403.01,2701.4 452.8,2651.61 452.8,2557.2 495,2515 1235,2515 1247.2,2527.2 U2.31
  Top Layer w32: P2.8 R50.1
  Bottom Layer w32: P2.8 R49.2
PA7: P2.7 R47.2 R48.1 U2.32 | length 1612.2
  Top Layer w11.8: R48.1@192.6,2644.09 235.29,2601.4 403.01,2601.4 435,2569.41 435,2500 480,2455 1259.98,2455 1266.89,2461.91 U2.32
  Top Layer w32: P2.7 R48.1
  Bottom Layer w32: P2.7 R47.2
PA8: P1.4 R9.2 R10.1 U2.67 | length 1161.1
  Top Layer w11.8: U2.67 1717.27,3058.74 1740,3036.01 1740,2816.25 1812.2,2744.05 1812.2,2627.63 1815,2624.83 1815,2526.91 1821.91,2520 1860,2520 1898.6,2481.4 1980,2481.4 1998.6,2500 2093.09,2500 2100,2506.91 2100,2547.4 R10.1
  Top Layer w32: R10.1 P1.4
  Bottom Layer w32: R9.2 P1.4
PA9: P1.5 R11.2 R12.1 U2.68 | length 1106.8
  Top Layer w11.8: U2.68 1722.76,3078.42 1750.59,3050.59 1765.71,3035.47 1765.71,2815.71 1830,2751.42 1830,2635 1840,2625 1855,2625 1855,2576.91 1861.91,2570 1875.59,2570 1886.99,2581.4 1980.08,2581.4 1998.68,2600 2088.09,2600 2095,2606.91 R12.1
  Top Layer w32: R12.1 P1.5
  Bottom Layer w32: R11.2 P1.5
PA10: P1.6 R13.2 R14.1 U2.69 | length 1013
  Top Layer w11.8: U2.69 1728.25,3098.11 1783.51,3042.84 1783.51,2825 1850,2758.51 1850,2681.91 1856.91,2675 1970,2675 1995,2700 2088.09,2700 2095,2706.91 2095,2747.6 R14.1
  Top Layer w32: R14.1 P1.6
  Bottom Layer w32: R13.2 P1.6
PA11: P1.7 R15.2 R16.1 U2.70 | length 946.6
  Top Layer w11.8: U2.70 1737.2,3117.8 1805,3050 1805,2850 1825,2830 1855,2830 1855,2786.91 1861.91,2780 1978.68,2780 1998.68,2800 2090,2800 2097.4,2807.4 R16.1
  Top Layer w32: R16.1 P1.7
  Bottom Layer w32: R15.2 P1.7
PA12: P1.8 R17.2 R18.1 U2.71 | length 868.5
  Top Layer w11.8: U2.71 1742.69,3137.48 1825,3055.17 1825,2936.91 1831.91,2930 1855,2930 1860,2925 1860,2881.91 1866.91,2875 1880.59,2875 1886.99,2881.4 1980.08,2881.4 1998.68,2900 2088.09,2900 2095,2906.91 2095,2947.6 R18.1
  Top Layer w32: R18.1 P1.8
  Bottom Layer w32: R17.2 P1.8
PA15: P1.9 R19.2 R20.1 U2.77 | length 1004.2
  Top Layer w11.8: U2.77 1601.54,3242.22 1613.85,3229.91 1641.23,3229.91 1648.22,3236.9 1784.07,3236.9 1800,3220.97 1800,3105.35 1860,3045.35 1860,2981.91 1866.91,2975 1975,2975 1983.54,2983.54 1983.54,2984.86 1998.68,3000 2090,3000 2097.4,3007.4 R20.1
  Top Layer w32: R20.1 P1.9
  Bottom Layer w32: R19.2 P1.9
PB0: P2.6 R45.2 R46.1 U2.35 | length 1780.7
  Top Layer w11.8: R46.1@192.6,2544.09 235.29,2501.4 403.01,2501.4 445,2459.41 445,2410 515,2340 1319.03,2340 1325.94,2346.91 U2.35
  Top Layer w32: P2.6 R46.1
  Bottom Layer w32: P2.6 R45.2
PB1: P2.5 R43.2 R44.1 U2.36 | length 1786.6
  Top Layer w11.8: R44.1@192.6,2444.09 235.29,2401.4 418.6,2401.4 520,2300 1338.72,2300 1345.63,2306.91 U2.36
  Top Layer w32: P2.5 R44.1
  Bottom Layer w32: P2.5 R43.2
PB2: P2.4 R41.2 R42.1 U2.37 | length 1925.3
  Top Layer w11.8: R42.1@192.6,2344.09 235.29,2301.4 438.09,2301.4 445,2294.49 445,2230 461.75,2213.25 1358.4,2213.25 1365.32,2220.16 U2.37
  Top Layer w32: P2.4 R42.1
  Bottom Layer w32: P2.4 R41.2
PB3: P1.10 R21.2 R22.1 U2.89 | length 1236
  Top Layer w11.8: U2.89 1365.32,3312.27 1381.05,3328 1752.48,3328 1764.4,3316.08 1764.4,3285.6 1820,3230 1820,3136.91 1826.91,3130 1855,3130 1865,3120 1865,3081.91 1871.91,3075 1975,3075 1983.54,3083.54 1983.54,3084.86 1993.68,3095 2100,3095 2100,3147.4 R22.1
  Top Layer w32: R22.1 P1.10
  Bottom Layer w32: R21.2 P1.10
PB4: P1.11 R23.2 R24.1 U2.90 | length 1192
  Top Layer w11.8: U2.90 1345.63,3317.76 1373.67,3345.8 1775.29,3345.8 1782.2,3338.89 1782.2,3292.97 1860,3215.17 1860,3176.91 1866.91,3170 1975,3170 1983.54,3178.54 1983.54,3184.86 1998.68,3200 2088.09,3200 2095,3206.91 2095,3247.4 R24.1
  Top Layer w32: R24.1 P1.11
  Bottom Layer w32: R23.2 P1.11
PB5: P1.12 R25.2 R26.1 U2.91 | length 1176.9
  Top Layer w11.8: U2.91 1325.95,3323.25 1366.3,3363.6 1791.4,3363.6 1800,3355 1800,3316.91 1806.91,3310 1850,3310 1850,3276.91 1856.91,3270 1970,3270 1978.54,3278.54 1978.54,3284.86 1993.68,3300 2085.49,3300 2092.4,3306.91 R26.1
  Top Layer w32: R26.1 P1.12
  Bottom Layer w32: R25.2 P1.12
PB6: P1.13 R27.2 R28.1 U2.92 | length 1118.3
  Top Layer w11.8: U2.92 1306.26,3328.73 1358.93,3381.4 1975.08,3381.4 1993.68,3400 2085.49,3400 2092.4,3406.91 R28.1
  Top Layer w32: R28.1 P1.13
  Bottom Layer w32: R27.2 P1.13
PB7: P1.14 R29.2 R30.1 U2.93 | length 1194.2
  Top Layer w11.8: U2.93 1286.57,3334.22 1351.56,3399.2 1369.37,3399.2 1370.17,3400 1782.85,3400 1864.04,3481.19 1873.81,3481.19 1875.09,3482.47 1884.86,3482.47 1885.93,3481.4 1970,3481.4 1988.6,3500 2093.09,3500 2100,3506.91 2100,3542.4 R30.1
  Top Layer w32: R30.1 P1.14
  Bottom Layer w32: R29.2 P1.14
PB8: P2.16 R65.2 R66.1 U2.95 | length 1512.5
  Top Layer w11.8: R66.1@192.6,3555.91 243.09,3606.4 923.09,3606.4 930,3599.49 930,3485 995,3420 1170,3420 1200,3390 1200,3365 1247.2,3317.8 U2.95
  Top Layer w32: P2.16 R66.1
  Bottom Layer w32: P2.16 R65.2
PB9: P2.15 R63.2 R64.1 U2.96 | length 1496.4
  Top Layer w11.8: R64.1@192.6,3455.91 233.09,3496.4 385.41,3496.4 401.81,3480 440,3480 515,3555 900,3555 910,3545 910,3460 970,3400 1164.83,3400 1182.2,3382.63 1182.2,3337.8 1195.42,3324.58 1215.21,3324.58 1225.64,3314.15 1225.64,3308.65 1227.52,3306.77 U2.96
  Top Layer w32: P2.15 R64.1
  Bottom Layer w32: P2.15 R63.2
PB10: P2.3 R39.2 R40.1 U2.47 | length 2105.3
  Top Layer w11.8: R40.1@192.6,2244.09 235.29,2201.4 421.25,2201.4 457.65,2165 1545.15,2165 1562.17,2182.02 1562.17,2642.17 ; 1562.17,2642.18 U2.47
  Top Layer w32: P2.3 R40.1
  Bottom Layer w32: P2.3 R39.2
PB11: P2.2 R37.2 R38.1 U2.48 | length 2175.4
  Top Layer w11.8: R38.1@192.6,2144.09 232.47,2104.22 1574.94,2104.22 1581.85,2111.14 U2.48
  Top Layer w32: P2.2 R38.1
  Bottom Layer w32: P2.2 R37.2
PB12: P2.1 R35.2 R36.1 U2.51 | length 2445.8
  Top Layer w11.8: R36.1@192.6,2044.09 238.79,1997.9 1675.33,1997.9 1682.24,2004.81 U2.51
  Top Layer w32: P2.1 R36.1
  Bottom Layer w32: P2.1 R35.2
PB13: P1.1 R3.2 R4.1 U2.52 | length 1218.3
  Top Layer w11.8: U2.52 1717.27,2763.46 1750,2730.73 1750,2285 1885,2150 2085,2150 2097.4,2162.4 R4.1
  Top Layer w32: R4.1 P1.1
  Bottom Layer w32: R3.2 P1.1
PB14: P1.2 R5.2 R6.1 U2.53 | length 1109.4
  Top Layer w11.8: U2.53 1722.76,2783.15 1775,2730.9 1775,2346.91 1781.91,2340 1840,2340 1898.6,2281.4 1980.08,2281.4 1998.68,2300 2090.49,2300 2097.4,2306.91 R6.1
  Top Layer w32: R6.1 P1.2
  Bottom Layer w32: R5.2@2084.8,2350 R5.2 P1.2
PB15: P1.3 R7.2 R8.1 U2.54 | length 1031.2
  Top Layer w11.8: U2.54 1728.25,2802.83 1794.4,2736.68 1794.4,2620.25 1795,2619.65 1795,2435 1805,2425 1850,2425 1893.6,2381.4 1975,2381.4 1993.6,2400 2093.09,2400 2100,2406.91 2100,2447.4 R8.1
  Top Layer w32: R8.1 P1.3
  Bottom Layer w32: R7.2@2084.8,2450 R7.2 P1.3
SWCLK: P3.3 U2.76 | length 641.8
  Top Layer w11.8: P3.3 1150,3475.63 1230.9,3394.73 1230.9,3391.32 1235,3387.22 v1(1235,3385) ; U2.76 U2.76@1621.22,3301.77 ; U2.76@1621.23,3301.77 1649.1,3301.77 v1(1650,3302.68)
  Bottom Layer w11.8: v1(1235,3385) 1235,3383.99 1245,3373.99 1245,3360 1270,3335 1617.68,3335 v1(1650,3302.68)
SWDIO: P3.2 U2.72 | length 973.4
  Top Layer w11.8: P3.2 1250,3470 1285.02,3434.98 v1(1285,3405) ; U2.72 1744.95,3157.17 1752.78,3165 v1(1755,3165)
  Bottom Layer w11.8: v1(1285,3405) 1285,3366.91 1291.91,3360 1803.09,3360 1810,3353.09 1810,3171.91 1803.09,3165 v1(1755,3165)
pads on no net: U2.1 U2.2 U2.3 U2.4 U2.5 U2.6 U2.7 U2.10 U2.11 U2.15 U2.16 U2.17 U2.18 U2.19 U2.21 U2.27 U2.33 U2.34 U2.38 U2.39 U2.40 U2.41 U2.42 U2.43 U2.44 U2.45 U2.46 U2.55 U2.56 U2.57 U2.58 U2.59 U2.60 U2.61 U2.62 U2.63 U2.64 U2.65 U2.66 U2.73 U2.78 U2.79 U2.80 U2.81 U2.82 U2.83 U2.84 U2.85 U2.86 U2.87 U2.88 U2.97 U2.98

## Polygon pours and split planes (outlines as drawn)
GND on GND Layer (split plane): 2265.92,3461.1 2265.92,1975.61 2262.5,1975.95 2258.58,1975.56 2254.81,1974.42 2254.19,1974.09 2254.18,1974.08 16.63,1974.08 12.7,1973.7 8.93,1972.55 5.46,1970.69 5,1970.32 4.54,1970.69 2.91,1971.57 3.2,1971.8 5.69,1974.85 7.55,1978.32 8.7,1982.09 9.08,1986.01 9.08,3969.02 9.29,3971.14 9.29,3972.12 9.38,3973.1 9.29,3974.09 9.29,3975.08 9.09,3976.04 9,3977.02 8.71,3977.97 8.51,3978.95 8.14,3979.85 7.85,3980.79 7.38,3981.67 7,3982.59 6.46,3983.4 6,3984.26 5.56,3984.79 11.7,3990.93 1121.22,3995.92 1121.3,3995.92 2254.96,3995.92 2255.07,3995.92 2255.11,3995.92 2255.16,3995.92 2257.07,3996.11 2258.99,3996.29 2259.03,3996.3 2259.08,3996.3 2260.92,3996.86 2262.76,3997.41 2262.8,3997.43 2262.85,3997.45 2264.54,3998.35 2265.92,3999.08
+3.3V on 3.3V Layer (split plane): 2265.92,3461.1 2265.92,1975.61 2262.5,1975.95 2258.58,1975.56 2254.81,1974.42 2254.19,1974.09 2254.18,1974.08 16.63,1974.08 12.7,1973.7 8.93,1972.55 5.46,1970.69 5,1970.32 4.54,1970.69 2.91,1971.57 3.2,1971.8 5.69,1974.85 7.55,1978.32 8.7,1982.09 9.08,1986.01 9.08,3969.02 9.29,3971.14 9.29,3972.12 9.38,3973.1 9.29,3974.09 9.29,3975.08 9.09,3976.04 9,3977.02 8.71,3977.97 8.51,3978.95 8.14,3979.85 7.85,3980.79 7.38,3981.67 7,3982.59 6.46,3983.4 6,3984.26 5.56,3984.79 11.7,3990.93 1121.22,3995.92 1121.3,3995.92 2254.96,3995.92 2255.07,3995.92 2255.11,3995.92 2255.16,3995.92 2257.07,3996.11 2258.99,3996.29 2259.03,3996.3 2259.08,3996.3 2260.92,3996.86 2262.76,3997.41 2262.8,3997.43 2262.85,3997.45 2264.54,3998.35 2265.92,3999.08

## Keep-outs
Keep-Out Layer:
  lines w32: -20,1970 795,1970 2255,1970 ; 0,3985 10,3995 1121.25,4000 2255,4000 ; 5,1965 5,3970 ; 2270,1970 2270,3461.1 2270,4010

## Silkscreen, mask and mechanical layers (free items; w line width, h text height)
Top Overlay:
  text "SWDIO" at 1269.4,3545 h50 r90
  text "+3.3V" at 1364.4,3545 h50 r90
  text "BOOT" at 1574.4,3545 h50 r90
  text "+3.3V" at 1679.4,3545 h50 r90
  text "GND" at 1064.4,3540 h50 r90
  text "SWCLK" at 1164.4,3540 h50 r90
  text "GND" at 1479.4,3540 h50 r90